# Altium PCB ALTAIR_PD_Sergeant_V26.2b_Reference.PcbDoc (part 3 of 4)
Units mm, origin at the board's own origin, x right, y up, seen from the top; angles counter-clockwise.
Board outline 74 x 56 mm, 4 copper layers (Top Layer, Layer 1, Layer 2, Bottom Layer), stack 1.675 mm thick; 187 components, 116 nets, 602 pads, 425 vias.
Unrouted connection lines stored in the file: 4.
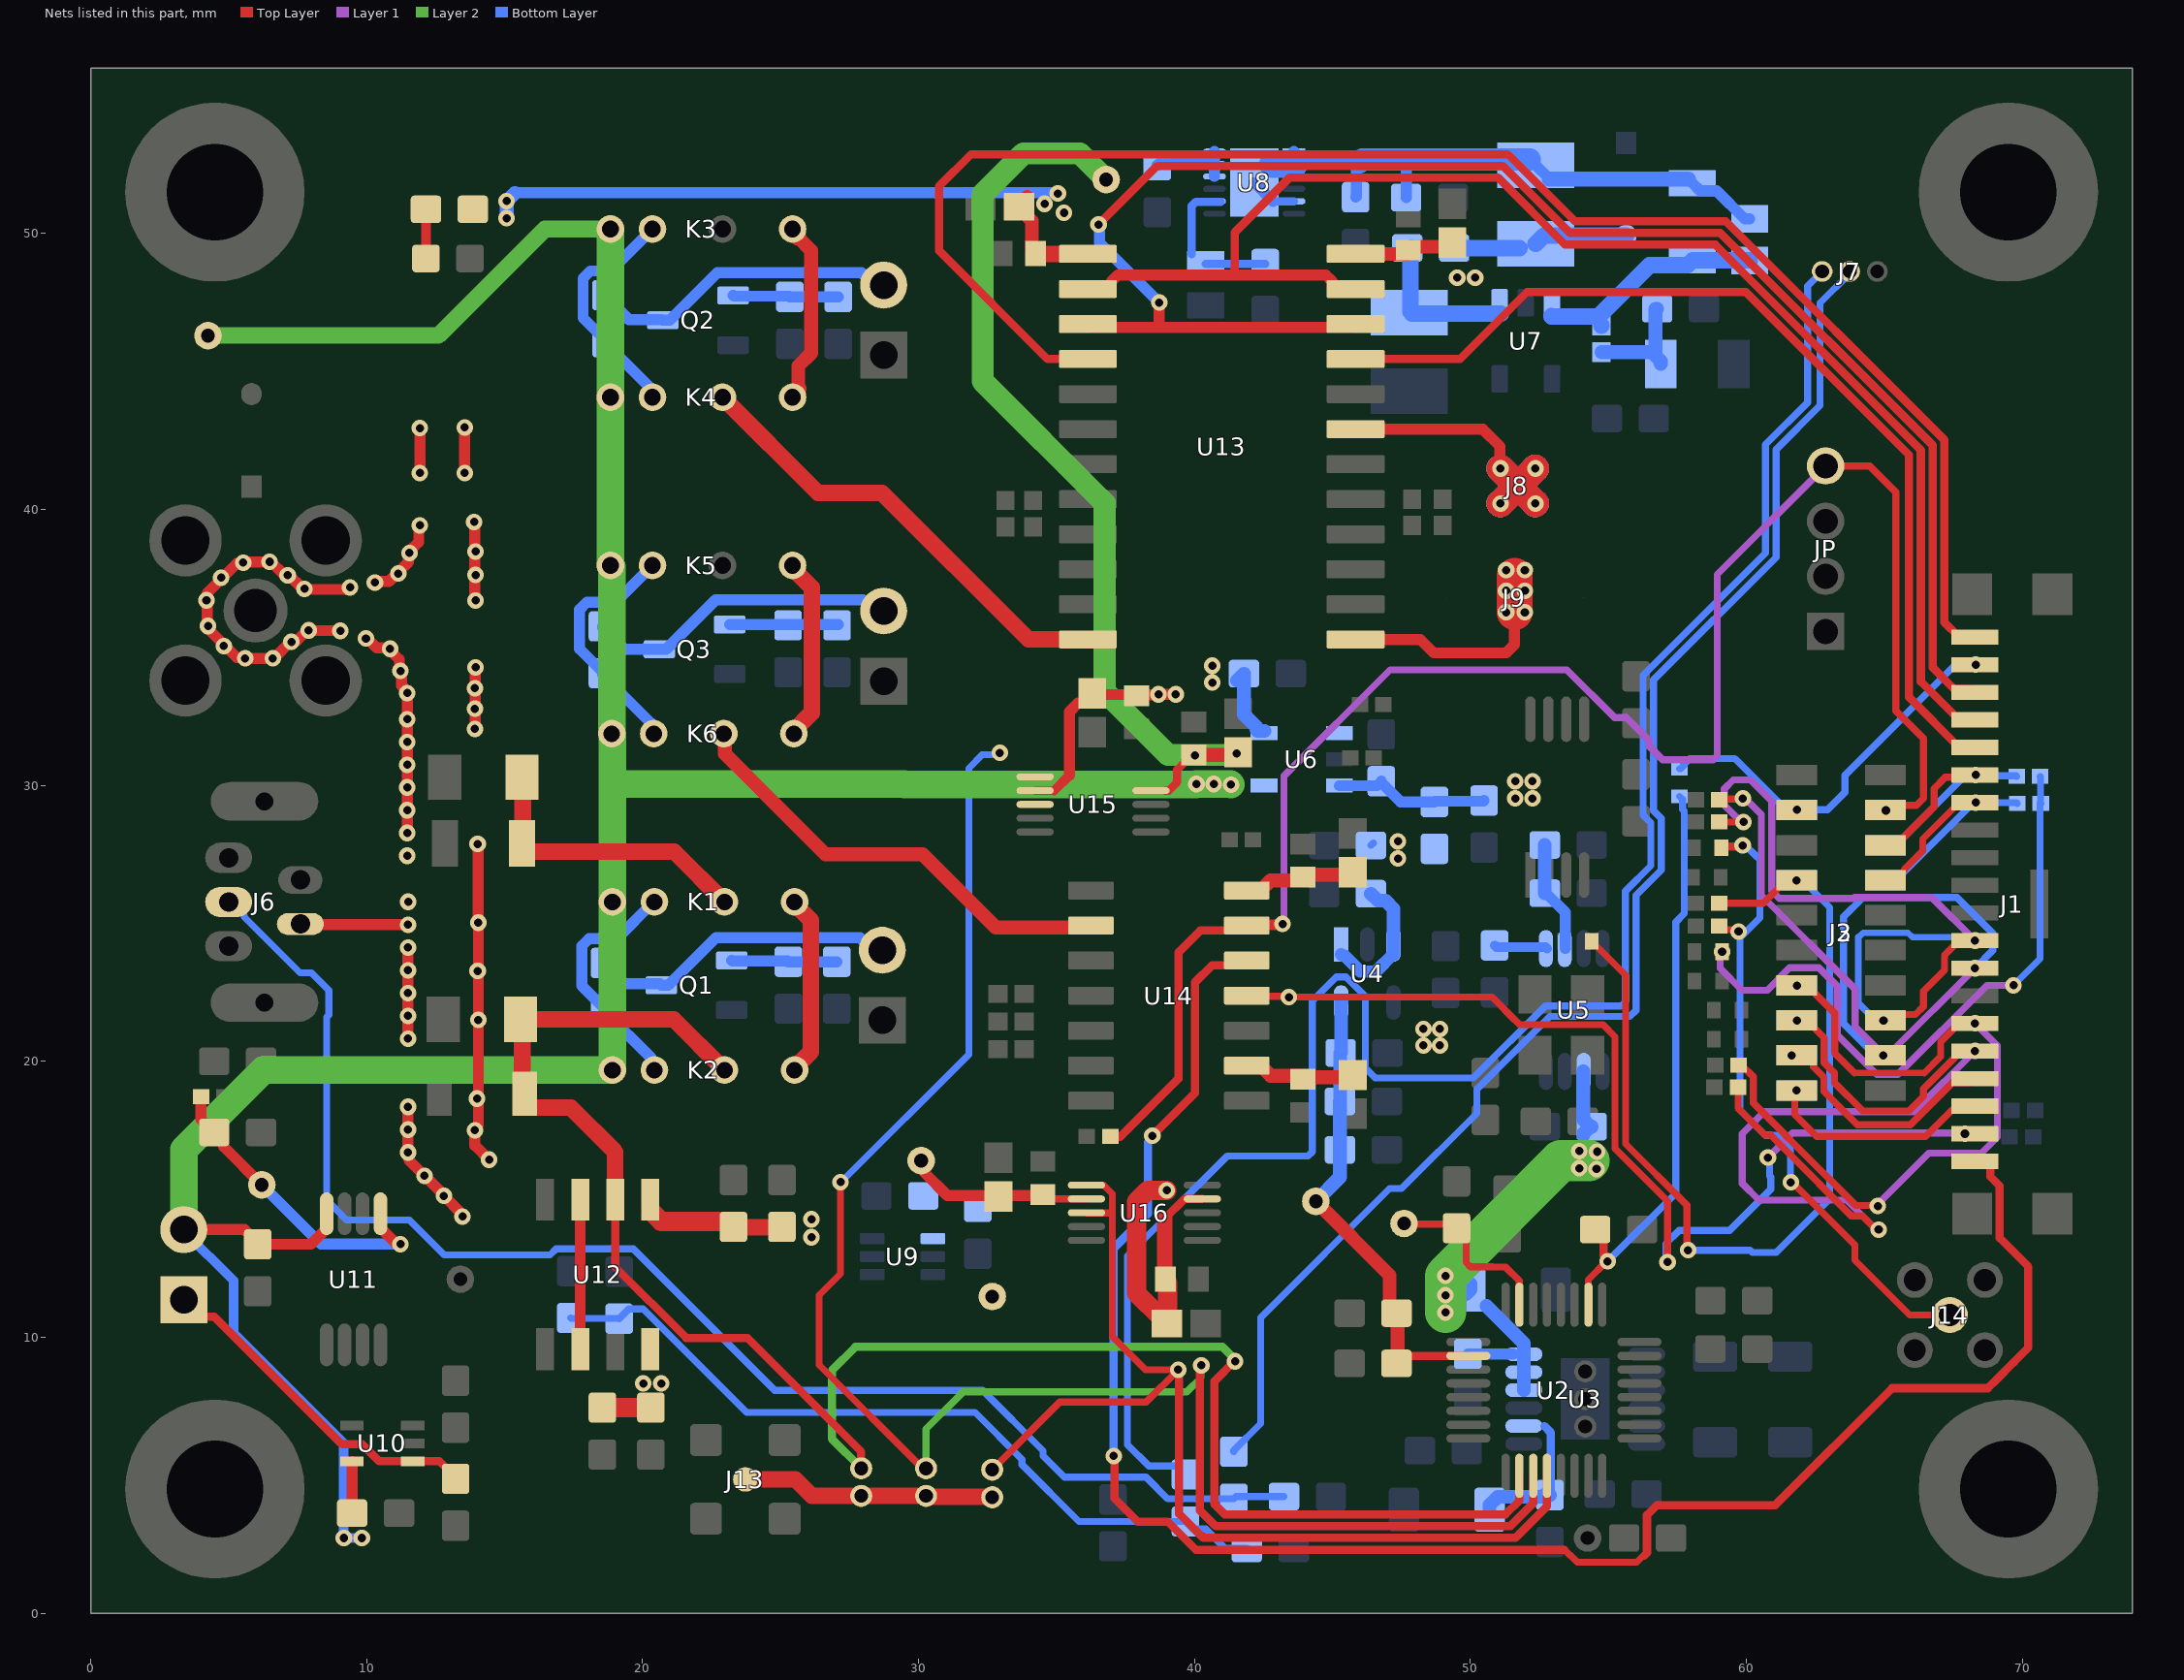
[diagram p4: the nets of this part, all layers, seen from the top]

## Via types
v1: diameter 0.6, hole 0.3, Top Layer to Bottom Layer, tented both sides, 244 vias
v2: diameter 0.8, hole 0.5, Top Layer to Bottom Layer, 122 vias
v3: diameter 0.6, hole 0.3, Top Layer to Bottom Layer, 59 vias

## Nets (pads, with @x,y where several pads share a name; then routed paths per layer and width w, separated by ;. In a path a pad name is that pad's centre, name@x,y a point inside that pad or via, vN(x,y) a via of type N, cw(c..) or ccw(c..) an arc to the next point about the centre after c; other vN are vias at no path point) (continued)
NetJ7_1: (continued)
  Bottom Layer w0.254: R43.2@39.369,5.331 38.353,5.331 37.575,6.109 37.575,12.95 41.197,16.572 44.126,16.572 44.275,16.721 44.275,22.187 45.144,23.056 45.493,23.056 46.196,22.353 46.196,19.754 46.55,19.4 50.117,19.4 52.724,22.006 55.474,22.006 55.623,22.155 55.623,26.171 56.54,27.089 56.54,28.648 56.259,28.929 56.259,33.98 60.7,38.421 60.7,42.35 62.225,43.875 62.225,48.1 J7.1@62.75,48.625
NetJ7_2: J7.2 R41.2 | length 54.2
  Bottom Layer w0.254: R41.2@41.429,5.85 41.429,5.9 42.4,6.871 42.4,10.71 47.077,15.387 47.508,15.387 50.238,18.117 50.238,18.982 52.881,21.625 54.664,21.625 55.781,21.625 56.004,21.848 56.004,22.965 56.004,26.014 56.921,26.931 56.921,28.806 56.64,29.087 56.64,33.822 61.081,38.263 61.081,42.17 62.675,43.764 62.675,47.481 63.75,48.556 J7.2@63.75,48.625
NetJ8_1: J8.1 J8.2 J8.3 J8.4 U13.7 | length 13.5
  Top Layer w0.3: v1@51.075,41.5 v1(51.09,41.485)
  Top Layer w0.4: U13.7@45.843,42.91 50.45,42.91 51.075,42.285 v1@51.075,41.5
  Top Layer w1: v1(51.09,40.215) 51.725,40.85 ; v1(51.09,41.485) 51.725,40.85 ; v1(52.36,40.215) 51.725,40.85 ; v1(52.36,41.485) 51.725,40.85
  Bottom Layer w1: v1(51.09,40.215) 51.725,40.85 ; v1(51.09,41.485) 51.725,40.85 ; v1(52.36,40.215) 51.725,40.85 ; v1(52.36,41.485) 51.725,40.85
NetJ9_1: J9.1 U13.1 | length 8.7
  Top Layer w0.4: U13.1@45.843,35.29 48.185,35.29 48.675,34.8 51.3,34.8 51.6,35.1 51.6,35.941 51.925,36.266 v1@51.925,36.275
  Top Layer w1.3: 51.6,36.275 51.6,37.05 51.6,37.6
  other v1: 51.3,36.275 51.975,36.275 51.3,37.05 51.975,37.05 51.3,37.8 51.975,37.8
NetJ10_2: J10.2 Q1.3 R32.1 | length 11.3
  Bottom Layer w0.4: R32.1@18.622,23.564 18.622,23.514 18.922,23.214 18.953,23.214 19.358,22.81 20.629,22.81 20.682,22.757 20.932,22.757 22.659,24.484 27.879,24.484 28.336,24.027 J10.2@28.688,24.027
NetJ11_2: J11.2 Q2.3 R35.1 | length 11.4
  Bottom Layer w0.4: R35.1@18.672,47.764 18.672,47.714 19.505,46.88 20.706,46.88 Q2.3@20.734,46.853 20.984,46.853 22.711,48.58 27.939,48.58 28.388,48.131 J11.2@28.74,48.131
NetJ12_2: J12.2 Q3.3 R38.1 | length 11.5
  Bottom Layer w0.4: R38.1@18.547,35.764 18.547,35.714 19.33,34.931 Q3.3@20.607,34.931 20.857,34.931 22.651,36.725 27.983,36.725 28.388,36.32 J12.2@28.74,36.32
NetJ13_1: J13.1 J_ACF.2 J_IVC.2 J_TIA.2 | length 9.2
  Top Layer w0.6: J13.1@23.725,4.85 25.537,4.85 26.137,4.25 J_ACF.2@30.275,4.25 30.3,4.225 32.65,4.225 J_IVC.2@32.675,4.2
NetJ14_1: J14.1 R62.1 R64.1 | length 23.8
  Top Layer w0.254: R64.1@59.025,24.9 59.156,24.769 59.656,24.769 v1@59.722,24.702 ; v1(61.616,15.616) 61.664,15.616 63.935,13.344 63.935,12.792 65.922,10.805 J14.1@67.38,10.805
  Top Layer w0.3: R62.1@59.1,27.746 59.138,27.784 59.834,27.784 v1@59.872,27.821
  Bottom Layer w0.254: v1@59.722,24.702 v1@59.86,24.565 ; v1@59.872,27.821 59.965,27.821 60.306,27.48 60.314,27.48 60.494,27.301 60.494,25.198 v1@59.86,24.565 ; v1(61.616,15.616) 61.597,15.634 61.597,16.943 61.218,17.322 60.682,17.322 59.772,18.232 59.772,24.477 v1@59.86,24.565
  other v1: 59.722,24.703 59.872,27.821
NetJ_ACF_1: J_ACF.1 U2.3 U15.6 U15.8 | length 62.2
  Top Layer w0.254: v1(27.175,15.625) 27.175,12.3 26.4,11.525 26.4,9 30.15,5.25 J_ACF.1@30.275,5.25 ; v1@40.2,8.93 v1(40.25,8.98)
  Top Layer w0.3: v1@40.2,8.93 40.2,3.725 40.771,3.154 51.454,3.154 52.279,3.979 U2.3@52.279,4.979
  Layer 2 w0.254: J_ACF.1@30.275,5.25 30.275,6.675 31.625,8.025 39.725,8.025 40.237,8.537 40.237,8.967 v1(40.25,8.98)
  Bottom Layer w0.254: v1@27.175,15.6 31.825,20.25 31.825,30.623 32.311,31.109 32.884,31.109 v1(32.95,31.175)
NetJ_IVC_1: J_IVC.1 U2.4 U16.6 U16.8 | length 38.8
  Top Layer w0.254: J_IVC.1@32.675,5.2 35.125,7.65 38.25,7.65 v1@39.416,8.816 ; U16.8@36.088,14.512 36.09,14.512 36.094,14.507 37.025,14.507 ; U16.6@36.088,15.512 36.713,15.512 37.025,15.2 37.025,14.507 ; v1(39.41,8.822) 38.229,8.822 37.025,10.025 37.025,14.507
  Top Layer w0.3: v1@39.45,8.816 39.45,3.6 40.323,2.727 51.631,2.727 52.779,3.875 U2.4@52.779,4.979
NetK1_2: K1.2 K2.2 R32.2 | length 8.9
  Bottom Layer w0.4: K2.2@20.429,19.709 20.314,19.824 20.314,20.122 18.622,21.814 R32.2@18.622,21.864 18.622,21.914 17.795,22.741 17.795,24.176 18.06,24.441 19.064,24.441 K1.2@20.429,25.805
NetK1_4: K1.4 K2.4 | length 6.6
  Top Layer w0.6: K2.4@25.509,19.682 25.509,19.756 26.106,20.353 26.106,25.107 25.509,25.704 K1.4@25.509,25.778
NetK3_2: K3.2 K4.2 R35.2 | length 8.6
  Bottom Layer w0.4: R35.2@18.672,46.014 20.243,44.443 20.243,44.182 K4.2@20.358,44.067 ; R35.2@18.672,46.064 18.672,46.114 17.845,46.941 17.845,48.376 18.11,48.641 18.836,48.641 K3.2@20.358,50.163
NetK3_4: K3.4 K4.4 | length 6.7
  Top Layer w0.5: K4.4@25.64,44.377 25.64,45.199 26.108,45.668 26.108,49.385 K3.4@25.64,49.853
  Top Layer w0.6: K4.4@25.438,44.067 25.438,44.175 K4.4@25.64,44.377 ; K3.4@25.438,50.163 25.438,50.055 K3.4@25.64,49.853
NetK4_3: K4.3 U13.24 | length 16.9
  Top Layer w0.6: K4.3@22.898,44.067 26.365,40.6 28.675,40.6 33.985,35.29 U13.24@36.143,35.29
NetK5_2: K5.2 K6.2 R38.2 | length 8.9
  Bottom Layer w0.4: R38.2@18.547,34.014 20.291,32.27 20.291,31.99 K6.2@20.405,31.875 ; R38.2@18.547,34.064 18.547,34.114 17.72,34.941 17.72,36.376 17.985,36.641 19.028,36.641 K5.2@20.358,37.971
NetK5_4: K5.4 K6.4 | length 6.7
  Top Layer w0.6: K5.4@25.438,37.971 25.438,37.863 26.131,37.17 26.131,32.628 25.485,31.983 K6.4@25.485,31.874
NetK6_3: K6.3 U14.2 | length 16.7
  Top Layer w0.5: K6.3@22.945,31.874 22.982,31.838 22.982,31.143 26.625,27.5 30.15,27.5 32.804,24.846 36.175,24.846 U14.2@36.25,24.921
NetQ1_1: Q1.1 R30.1 R31.1 | length 3.8
  Bottom Layer w0.4: Q1.1@23.232,23.657 23.257,23.632 25.261,23.632 R31.1@25.286,23.607 R30.1@27.04,23.607
NetQ2_1: Q2.1 R33.1 R34.1 | length 3.8
  Bottom Layer w0.4: Q2.1@23.284,47.753 23.309,47.728 25.313,47.728 R34.1@25.338,47.703 R33.1@27.092,47.703
NetQ3_1: Q3.1 R36.1 R37.1 | length 3.9
  Bottom Layer w0.4: Q3.1@23.157,35.831 R37.1@25.294,35.831 ; R37.1@25.3,35.825 R36.1@27.1,35.825
NetR1_2: R1.2 R2.2 U2.18 | length 21.3
  Top Layer w0.254: U2.18@54.279,11.179 54.279,12.09 54.939,12.75 v1(54.975,12.75)
  Top Layer w0.3: R1.2@54.525,13.9 54.825,13.6 54.825,12.981 54.975,12.831 v1(54.975,12.75)
  Bottom Layer w0.254: v1(54.975,12.75) 57.444,15.219 57.444,25.04 57.75,25.346 57.75,29.075 57.69,29.135 57.69,29.485 R2.2@57.575,29.6
NetR3_2: R3.2 R4.2 R57.2 | length 23.9
  Layer 1 w0.254: v1(59.125,23.971) 59.059,23.905 59.059,23.366 59.847,22.578 60.768,22.578 61.168,22.978 61.168,22.989 61.569,23.389 62.633,23.389 63.294,22.728 63.294,20.956 64.725,19.525 65.495,19.525 68.722,22.752 v1(69.686,22.752)
  Bottom Layer w0.254: v1(69.686,22.752) 70.65,23.716 70.65,29.325 R4.2@70.675,29.35 ; R4.2@70.65,29.375 70.663,29.387 70.663,30.312 R3.2@70.65,30.325